# Altium PCB waterpump.PcbDoc
Units mm, origin at the board's own origin, x right, y up, seen from the top; angles counter-clockwise.
Board outline 92 x 86 mm, 2 copper layers (Top Layer, Bottom Layer), stack 1.58 mm thick; 34 components, 42 nets, 144 pads, 22 vias.
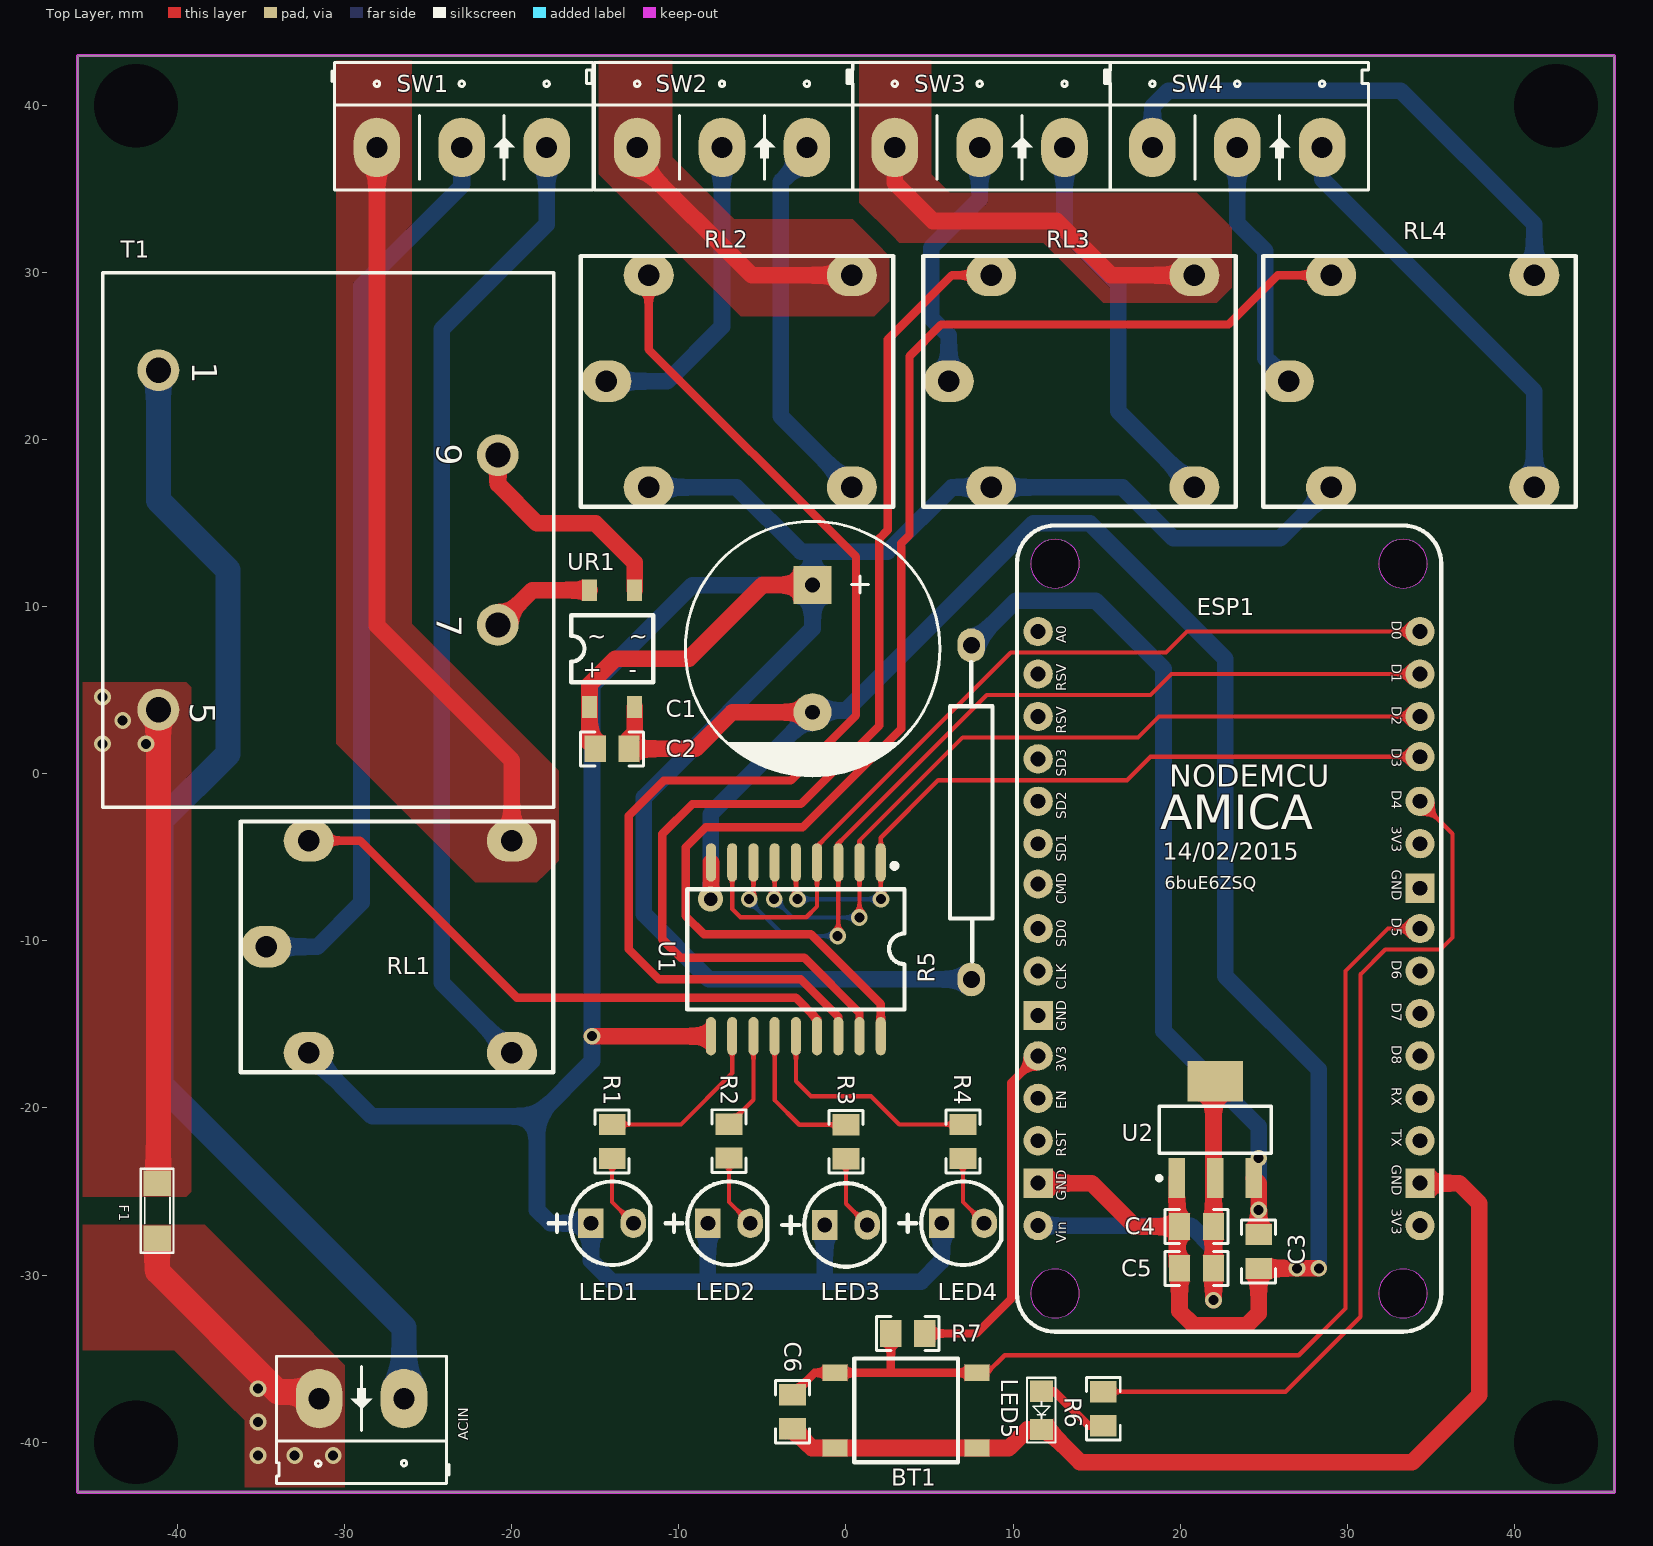
[diagram p0: Top Layer view]
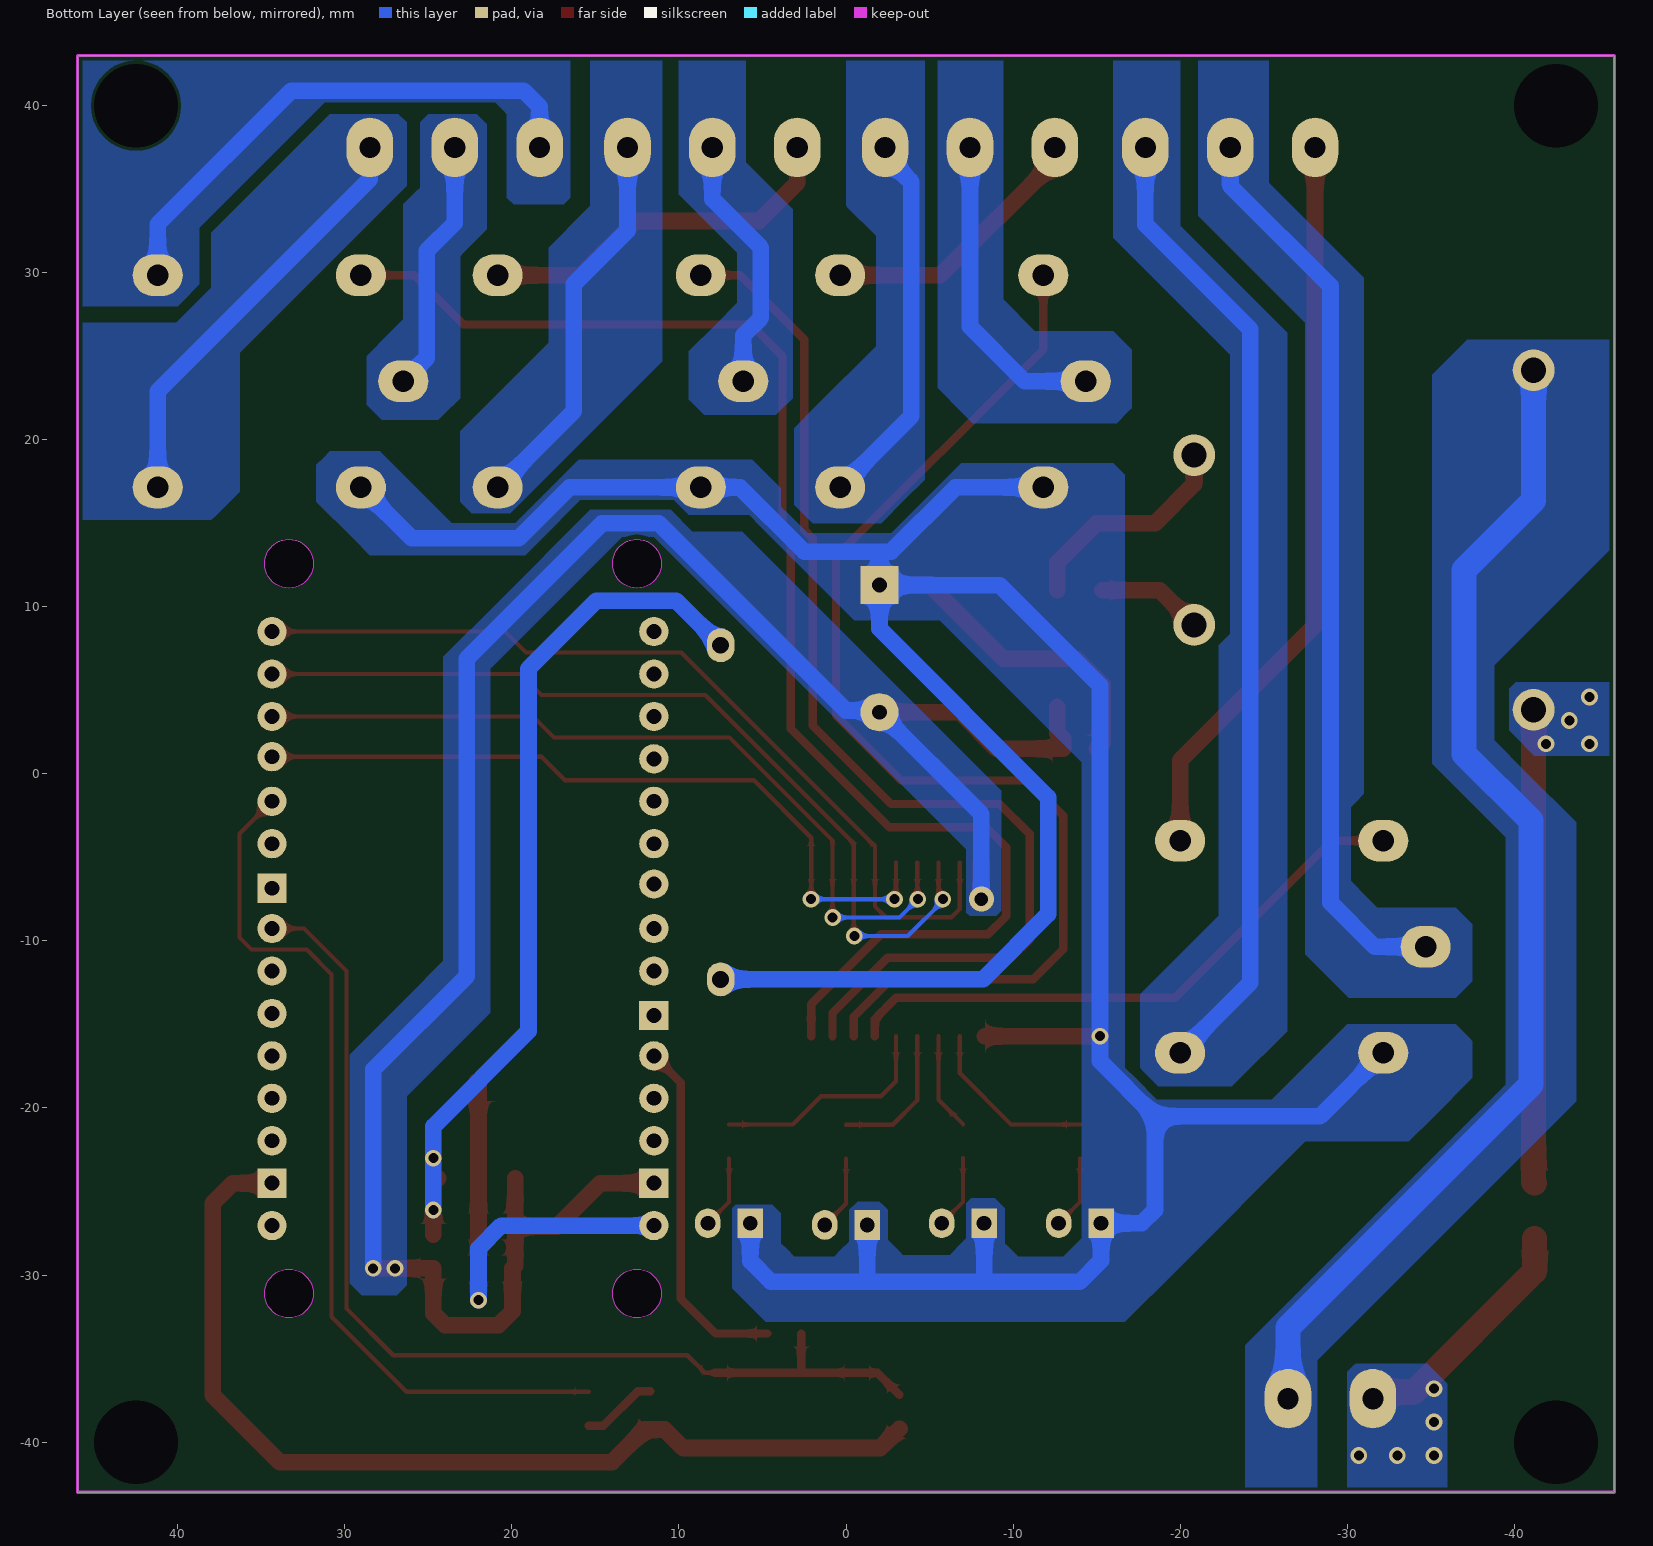
[diagram p1: Bottom Layer view, seen from below]

## Layer stack, top to bottom
Top Solder: solder mask 0.0102, Solder Resist, Dk 3.5
Top Layer: signal copper 0.0356
Dielectric 1: dielectric 1.5086, FR-4, Dk 4.8
Bottom Layer: signal copper 0.0356
Bottom Solder: solder mask 0.0102, Solder Resist, Dk 3.5

## Board outline
-46,-43 46,-43 46,43 -46,43

## Design rules (kind name [scope] priority, off if disabled: settings)
Clearance Clearance_1 [InNet('GND')] p1: gap=0.254
Clearance cutout [IsRegion] p2: gap=0.2
Clearance keepout [OnLayer('Keep-Out Layer')] p3: gap=0.2
Clearance [All] p4: gap=0.254
HoleSize [All] p1: absolutevalues=TRUE maxlimit=5 minlimit=0.01 maxpercent=80.000 minpercent=20.000
MinimumSolderMaskSliver [All] p1: minsoldermaskwidth=0.01
PolygonConnect [All] p1: connectstyle=Direct reliefconductorwidth=0.254 reliefentries=4 polygonreliefangle="90 Angle" airgapwidth=0.254
RoutingVias [All] p1: holewidth=0.3 width=0.6 viastyle="Through Hole" minholewidth=0.3 minwidth=0.6 maxholewidth=5 maxwidth=5
SilkToSilkClearance [All] p1: silktosilkclearance=0.1
SilkToSolderMaskClearance [IsPad] p1: minsilkscreentomaskgap=0.01 clearancetoexposedcopper=TRUE
SolderMaskExpansion [All] p1: expansion=0.102
Width [All] p1: maxlimit=5 minlimit=0.254 preferedwidth=0.254
26 further rules are at their usual default settings.

## Components (designator, comment, footprint, x,y, rotation, side; value= is the part's Value field where it differs from the comment)
ACIN "CON 2 KF301_MH" "CON 2 KF301" -29,-37.4 r180 top (schematic designator CON1)
BT1 "configure" "BUTTON 4P SMD" 3.6,-38.1 r0 top
C1 "2200uF" CP3/7 -2,7.5 r270 top locked
C2 "105" 0805_HV -14,1.5 r180 top
C3 "105" 0805_HV 24.7,-28.584 r90 top
C4 "105" 0805_HV 20.984,-27.1 r0 top
C5 "105" 0805_HV 20.984,-29.6 r0 top
C6 "105" 0805_HV -3.2,-38.184 r90 top
ESP1 "NodeMCU V1.0 ESP-12E" ESP-8266 10.205,14.768 r0 top locked
F1 "FUSE_AUTO_0.5A 8V 1206_MH" "FUSE 1206" -41.2,-26.2 r90 top
LED1 "LED3" "LED 3mm Do" -14,-26.9 r0 top
LED2 "LED3" "LED 3mm Do" -7,-26.9 r0 top
LED3 "LED3" "LED 3mm Do" 0,-27 r0 top
LED4 "LED3" "LED 3mm Do" 7,-26.9 r0 top
LED5 "status" LED_0805 11.7,-38.1 r270 top
R1 "1K" 0805_HV -14,-22 r270 top
R2 "1K" 0805_HV -7,-21.984 r270 top
R3 "1K" 0805_HV 0,-22.016 r270 top
R4 "1K" 0805_HV 7,-22 r270 top
R5 "10R" TRO_VACH_2W 7.5,-2.3 r90 top
R6 "1K" 0805_HV 15.4,-38 r90 top
R7 "1K" 0805_HV 3.7,-33.5 r0 top
RL1 "Relay 10A 5pin_MH" "relay 10A 5pin" -27.35,-10.35 r270 top locked
RL2 "Relay 10A 5pin_MH" "relay 10A 5pin" -7,23.5 r270 top locked
RL3 "Relay 10A 5pin_MH" "relay 10A 5pin" 13.5,23.5 r270 top locked
RL4 "Relay 10A 5pin_MH" "relay 10A 5pin" 33.85,23.5 r270 top locked
SW1 "CON 3 KF301_MH" "CON 3 KF301" -23,37.5 r0 top
SW2 "CON 3 KF301_MH" "CON 3 KF301" -7.42,37.5 r0 top (schematic designator SW1)
SW3 "CON 3 KF301_MH" "CON 3 KF301" 8,37.5 r0 top (schematic designator SW1)
SW4 "CON 3 KF301_MH" "CON 3 KF301" 23.42,37.5 r0 top (schematic designator SW1)
T1 "Trans Eq" AS3010 -31,14 r270 top locked
U1 "ULN2803A" SOIC-18_300MIL -3,-10.5 r270 top locked
U2 "AMS1117-5V SOT223 _MH" SOT223 22.1,-21.3 r0 top
UR1 "MB6S" MB6S -14,7.5 r0 top

## Footprints (in the part's own frame and the unit in brackets; to place one, negate y for a bottom-side part, rotate by r counter-clockwise, add the part's x,y. Pads: shape width x height; smd on the part's side, far side on the other; paste and mask are expansions set on the pad)
0805_HV [mil] "0805 with 30mil clearance between pads"
  rect 50x63 smd: 1(-40,0) 2(40,0)
  silkscreen extent -74,-40 74,40, body extent -43,-29 43,29, height 57
AS3010 [mm] "S3010-E-0150-120-S"
  round 2.5 hole 1.5: 1(-10.16,-10.16) 2(10.16,-10.16) 3(5.08,10.16) 4(-5.08,10.16)
  silkscreen extent -16,-13.5 16,13.5
"BUTTON 4P SMD" [mm]
  rect 1.5x1 smd: 1(-4.25,2.25) 1(4.25,2.25) 2(-4.25,-2.25) 2(4.25,-2.25)
  silkscreen extent -3.1,-3.1 3.1,3.1
"CON 2 KF301" [mil]
  oval 110x140 hole 50: 1(-100,0) 2(100,0)
  silkscreen extent -206,-100 200,200, body extent -197,-98 197,198, height 394
"CON 3 KF301" [mil]
  oval 110x140 hole 50: 1(-200,0) 2(0,0) 3(200,0)
  silkscreen extent -306,-100 309,200
CP3/7 [mil] "Tu hoa 4700uF/25V"
  rect 90x90 hole 35: 1(-150,0)
  round 90 hole 35: 2(150,0)
  silkscreen extent -300,-300 300,300
ESP-8266 [mil]
  round 115 hole 115 unplated paste-300 mask-300: 0(91,-1806) 0(91,-86) 0(911,-1806) 0(911,-86)
  round 69 hole 35: 3V3(51,-1246) 3V3(951,-746) A0(51,-246) CLK(51,-1046) CMD(51,-841) D0(951,-246) D1(951,-346) D2(951,-446) D3(951,-541) D4(951,-646) D5(951,-946) D6(951,-1046) D7(951,-1146) D8(951,-1246) EN(51,-1346) NC(951,-1646) RST(51,-1446) RSV(51,-446) RSV(51,-346) RX(951,-1346) SD0(51,-946) SD1(51,-746) SD2(51,-646) SD3(51,-546) TX(951,-1446) VIN(51,-1646)
  rect 69x69 hole 35: GND(51,-1546) GND_ESP(51,-1151) GND_ESP(951,-1546) GND_ESP(951,-851)
  Keep-Out Layer circle w2: c91,-86 r57.5
  Keep-Out Layer circle w2: c911,-86 r57.5
  Keep-Out Layer circle w2: c91,-1806 r57.5
  Keep-Out Layer circle w2: c911,-1806 r57.5
  silkscreen extent 1,-1896 1001,4
"FUSE 1206" [mil]
  rect 60x65 smd: 1(-63,0.94) 2(67,0.94)
  silkscreen extent -97,-37 101,40, body extent -63,-33 63,33, height 22
"LED 3mm Do" [mil] "Footprintf LED phi 3"
  rect 60x70 hole 35: 1(-50,0)
  oval 60x70 hole 35: 2(50,0)
  silkscreen extent -150,-98 90,98, body extent -77,-78 60,78, height 205
LED_0805 [mil]
  rect 50x55 smd: 1(-45,0) 2(45,0)
  silkscreen extent -77,-34 76,33, body extent -41,-16 41,20, height 33
MB6S [mm]
  rect 0.9x1.3 smd: 1(-1.35,-3.5) 2(1.35,-3.5) 3(1.35,3.5) 4(-1.35,3.5)
  silkscreen extent -2.44,-2.01 2.46,1.99
"relay 10A 5pin" [mm]
  oval 2.5x3 hole 1.3: 1(0,-7.35) 2(-6.35,7.35) 3(6.35,7.35) 4(-6.35,-4.81) 5(6.35,-4.81)
  silkscreen extent -7.49,-8.87 7.51,9.83, body extent -7.49,-8.87 7.49,9.79, height 16
SOIC-18_300MIL [mm]
  oval 2.3x0.6 smd: 1(-5.2,5.08) 2(-5.2,3.81) 3(-5.2,2.54) 4(-5.2,1.27) 5(-5.2,0) 6(-5.2,-1.27) 7(-5.2,-2.54) 8(-5.2,-3.81) 9(-5.2,-5.08) 10(5.2,-5.08) 11(5.2,-3.81) 12(5.2,-2.54) 13(5.2,-1.27) 14(5.2,0) 15(5.2,1.27) 16(5.2,2.54) 17(5.2,3.81) 18(5.2,5.08)
  silkscreen extent -5.15,-6.5 3.6,6.5, body extent -5.15,-5.76 5.15,5.77, height 2.65
SOT223 [mm]
  rect 1x2.4 smd: 1(-2.3,-2.9) 2(0,-2.9) 3(2.3,-2.9)
  rect 3.3x2.4 smd: 4(0,2.9)
  silkscreen extent -3.47,-3.02 3.35,1.4, body extent -3.25,-3.56 3.25,3.4, height 1.68
TRO_VACH_2W [mil]
  oval 80x65 hole 40: 1(-393.7,0) 2(393.7,0)
  silkscreen extent -351,-50 354,50, body extent -414,-110 414,107, height 217

## Part data
ACIN: "CON 2 KF301, 5.08mm"
BT1: library part "BUTTON 4P SMD_MH", "Nút nh?n 4 chân, dán"
C1: library part TU_HOA_2200uF_25V_MH, "2200uF_25V"
C2 C3 C4 C5 C6: library part CM, "Cap SMD"
ESP1: "NodeMCU V1.0 ESP8266 (ESP-12E)"
F1: "Fuse"
LED1 LED2 LED3 LED4: library part "LED 3mm_MH", "LED 3mm"
LED5: library part "LED SMD_0805_MH", "LED 3mm"
R1 R2 R3 R4 R6 R7: library part R, "Resistor 1/4W"
R5: library part TRO_CS_2W_MH
RL1 RL2 RL3 RL4: "Relay"
SW1 SW2 SW3 SW4: "CON 3 KF301, 5.08mm"
T1: "Transformer (Equivalent Circuit Model)"
U2: library part "AMS1117-3.3V SOT223 _MH", "AMS1117-3.3V SOT223 _MH"

## Free pads (board coordinates)
  round 3 hole 5 paste+0: NC(-42.5,-40) NC(-42.5,40) NC(42.5,-40) NC(42.5,40)

## Via types
v1: diameter 1, hole 0.6, Top Layer to Bottom Layer, tented both sides, 21 vias
v2: diameter 1.5, hole 0.8, Top Layer to Bottom Layer, tented both sides, 1 vias

## Nets (pads, with @x,y where several pads share a name; then routed paths per layer and width w, separated by ;. In a path a pad name is that pad's centre, name@x,y a point inside that pad or via, vN(x,y) a via of type N, cw(c..) or ccw(c..) an arc to the next point about the centre after c; other vN are vias at no path point)
3.3V: ESP1.3V3@11.5,-16.88 R7.2 | length 21.2
  Top Layer w0.5: R7.2 7.8,-33.5 9.9,-31.4 9.9,-18.48 ESP1.3V3@11.5,-16.88
5V: C4.2 C5.2 ESP1.VIN U2.2 U2.4 | length 27.3
  Top Layer w1: v1(22,-31.5) C5.2 C4.2 22,-18.5 U2.4
  Bottom Layer w1: ESP1.VIN 20.64,-27.04 22,-28.4 v1(22,-31.5)
ACIN_L: ACIN.1 T1.1 | length 70.6
  Bottom Layer w1.5: T1.1 -41.16,16.36 -37,12.2 -37,1.2 -41,-2.8 -41,-18.6 -26.46,-33.14 ACIN.1@-26.46,-37
ACIN_N: F1.2 T1.2 | length 28.4
  Top Layer w1.5: F1.2 -41.16,-24.434 T1.2
  other v1: -44.5,1.8 -41.9,1.8 -43.3,3.2 -44.5,4.6
ACO1: T1.3 UR1.4 | length 6.4
  Top Layer w1: T1.3 -18.76,11 UR1.4
ACO2: T1.4 UR1.3 | length 13.5
  Top Layer w1: T1.4 -20.84,17.34 -18.5,15 -15,15 -12.65,12.65 UR1.3
BT1: BT1.1 C6.2 ESP1.D5 R7.1 | length 63.3
  Top Layer w0.254: BT1.1@7.85,-35.85 8.45,-35.85 9.5,-34.8 27.1,-34.8 29.9,-32 29.9,-11.8 32.44,-9.26 ESP1.D5
  Top Layer w0.5: C6.2 -1.882,-35.85 -0.65,-35.85 2.6,-35.85 ; R7.1 2.684,-35.766 2.6,-35.85 ; BT1.1@7.85,-35.85 2.6,-35.85
GND: C1.2 C2.1 C3.1 C4.1 C5.1 ESP1.GND U1.9 U2.1 UR1.2 | length 131.3
  Top Layer w1: UR1.2 -12.65,2.45 -12.984,2.116 C2.1 -9,1.5 -6.81,3.69 C1.2 ; v2(-8.1,-7.5) -8.08,-7.48 U1.9 ; ESP1.GND 14.7,-24.5 17.3,-27.1 C4.1@19.8,-27.1 ; U2.1 C4.1@19.8,-27.1 ; C4.1 C4.1@19.8,-27.1 ; v1(28.3,-29.6) v1(27,-29.6) C3.1 24.7,-32.3 24,-33 20.8,-33 19.968,-32.168 C5.1 19.8,-29.432 C4.1@19.8,-27.1
  Bottom Layer w1: v2(-8.1,-7.5) -8.1,-2.41 C1.2 -2,3.8 0,3.8 11.2,15 14.6,15 22.7,6.9 22.7,-12.1 28.3,-17.7 v1(28.3,-29.6)
GND_ESP: BT1.2 C6.1 ESP1.GND_ESP@34.36,-24.5 LED5.2 | length 60
  Top Layer w1: C6.1 -2.05,-40.35 -0.65,-40.35 7.85,-40.35 9.75,-40.35 10.857,-39.243 LED5.2 12.043,-39.243 14,-41.2 33.9,-41.2 37.9,-37.2 37.9,-25.7 36.7,-24.5 ESP1.GND_ESP@34.36,-24.5
LED1: R1.1 U1.11 | length 10.7
  Top Layer w0.254: R1.1 -9.884,-20.984 -6.81,-17.91 U1.11
LED2: R2.1 U1.12 | length 5.9
  Top Layer w0.254: R2.1 -5.54,-19.508 U1.12
LED3: R3.1 U1.13 | length 8.7
  Top Layer w0.254: U1.13 -4.27,-19.53 -2.8,-21 R3.1
LED4: R4.1 U1.14 | length 13.8
  Top Layer w0.254: U1.14 -3,-18.4 -2.1,-19.3 1.5,-19.3 3.184,-20.984 R4.1
LED5: ESP1.D4 R6.2 | length 53.1
  Top Layer w0.254: R6.2 26.316,-36.984 30.8,-32.5 30.8,-12 32.283,-10.517 35.583,-10.517 36.3,-9.8 36.3,-3.58 ESP1.D4
NetACIN_2: ACIN.2 F1.1 | length 14.7
  Top Layer w1.5: F1.1 -41.224,-29.776 -34,-37 ACIN.2@-31.54,-37
  other v1: -35.2,-40.8 -33,-40.8 -30.7,-40.8 -35.2,-38.8 -35.2,-36.8
NetC3_2: C3.2 R5.2 U2.3 | length 52.5
  Top Layer w1: U2.3 24.7,-24.5 C3.2
  Bottom Layer w1: R5.2 10.169,10.369 14.931,10.369 19,6.3 19,-15.4 24.7,-21.1 v1(24.7,-23) v1(24.7,-26.1)
NetLED1_2: LED1.2 R1.2 | length 4.4
  Top Layer w0.254: R1.2 -14,-25.63 LED1.2
NetLED2_2: LED2.2 R2.2 | length 4.4
  Top Layer w0.254: R2.2 -7,-25.63 LED2.2
NetLED3_2: LED3.2 R3.2 | length 4.5
  Top Layer w0.254: R3.2 0,-25.73 LED3.2
NetLED4_2: LED4.2 R4.2 | length 4.4
  Top Layer w0.254: R4.2 7,-25.63 LED4.2
NetLED5_1: LED5.1 R6.1 | length 4.6
  Top Layer w0.5: LED5.1 12.457,-36.957 14.516,-39.016 R6.1
NetRL1_1: RL1.1 SW1.2 | length 54
  Bottom Layer w1: RL1.1 -31.65,-10.35 -29,-7.7 -29,29.2 -23,35.2 SW1.2@-23,37
NetRL1_2: RL1.2 SW1.1 | length 44.3
  Top Layer w1: SW1.1@-28.08,37 -28.08,8.88 -20,0.8 RL1.2
NetRL1_3: RL1.3 SW1.3 | length 58
  Bottom Layer w1: RL1.3 -24.2,-12.5 -24.2,26.6 -17.92,32.88 SW1.3@-17.92,37
NetRL2_1: RL2.1 SW2.2 | length 18.5
  Bottom Layer w1: RL2.1 -10.7,23.5 -7.42,26.78 SW2.2@-7.42,37
NetRL2_2: RL2.2 SW2.1 | length 16
  Top Layer w1: SW2.1@-12.5,37 -12.5,36.7 -5.65,29.85 RL2.2
NetRL2_3: RL2.3 SW2.3 | length 22.3
  Bottom Layer w1: SW2.3@-2.34,37 -3.9,35.44 -3.9,21.4 RL2.3
NetRL3_1: RL3.1 SW3.2 | length 15.1
  Bottom Layer w1: RL3.1 6.15,26.25 5.1,27.3 5.1,31.5 8,34.4 SW3.2@8,37
NetRL3_2: RL3.2 SW3.1 | length 21.8
  Top Layer w1: SW3.1@2.92,37 2.92,35.38 5.2,33.1 12.6,33.1 15.85,29.85 RL3.2
NetRL3_3: RL3.3 SW3.3 | length 23.1
  Bottom Layer w1: SW3.3@13.08,37 13.08,32.52 16.3,29.3 16.3,21.7 RL3.3
NetRL4_1: RL4.1 SW4.2 | length 14.8
  Bottom Layer w1: SW4.2@23.42,37 23.42,32.98 25.1,31.3 25.1,24.9 RL4.1
NetRL4_2: RL4.2 SW4.1 | length 32.6
  Bottom Layer w1: SW4.1@18.34,37 SW4.1 18.34,39.94 19.3,40.9 33.2,40.9 41.2,32.9 RL4.2
NetRL4_3: RL4.3 SW4.3 | length 25.1
  Bottom Layer w1: SW4.3@28.5,37 28.5,35.6 41.2,22.9 RL4.3
RL1: RL1.4 U1.15 | length 35.9
  Top Layer w0.5: RL1.4 -29.1,-4 -19.7,-13.4 -3,-13.4 -1.73,-14.67 U1.15
RL2: RL2.4 U1.16 | length 70.9
  Top Layer w0.5: RL2.4 -11.81,25.41 0.6,13 0.6,3.5 -3.3,-0.4 -10.9,-0.4 -13,-2.5 -13,-10.5 -11.2,-12.3 -2.7,-12.3 -0.46,-14.54 U1.16
RL3: RL3.4 U1.17 | length 68.1
  Top Layer w0.5: U1.17 0.81,-14.31 -2.5,-11 -9.9,-11 -11,-9.9 -11,-3.6 -9.2,-1.8 -2.7,-1.8 2,2.9 2,14.1 2.5,14.6 2.5,26 6.35,29.85 RL3.4
RL4: RL4.4 U1.18 | length 85.5
  Top Layer w0.5: U1.18 2.08,-13.78 -2.1,-9.6 -8.5,-9.6 -9.6,-8.5 -9.6,-4.4 -8.4,-3.2 -2.6,-3.2 3.3,2.7 3.3,13.8 3.8,14.3 3.8,25 5.7,26.9 22.9,26.9 25.85,29.85 RL4.4
RLC1: ESP1.D0 U1.4 U1.8 | length 53.4
  Top Layer w0.254: U1.8 -6.81,-8.09 -6.319,-8.581 -2.381,-8.581 -1.73,-7.93 U1.4 -1.73,-4.33 9.863,7.263 19.163,7.263 20.42,8.52 ESP1.D0
RLC2: ESP1.D1 U1.3 U1.7 | length 53.4
  Top Layer w0.254: v1(-5.8,-7.5) -5.58,-7.5 -5.54,-7.54 U1.7 ; v1(-0.5,-9.7) -0.46,-9.66 U1.3 -0.46,-4.16 8.423,4.723 18.223,4.723 19.48,5.98 ESP1.D1
  Bottom Layer w0.254: v1(-5.8,-7.5) -5.8,-7.6 -3.7,-9.7 v1(-0.5,-9.7)
RLC3: ESP1.D2 U1.2 U1.6 | length 49
  Top Layer w0.254: v1(-4.3,-7.5) -4.27,-7.47 U1.6 ; v1(0.8,-8.6) 0.81,-8.59 U1.2 0.81,-3.99 6.983,2.183 17.483,2.183 18.74,3.44 ESP1.D2
  Bottom Layer w0.254: v1(-4.3,-7.5) -3.2,-8.6 v1(0.8,-8.6)
RLC4: ESP1.D3 U1.1 U1.5 | length 45.2
  Top Layer w0.254: U1.5 -3,-7.4 v1(-2.9,-7.5) ; v1(2.1,-7.5) 2.08,-7.48 U1.1 2.08,-3.82 5.517,-0.383 16.817,-0.383 18.227,1.027 ESP1.D3
  Bottom Layer w0.254: v1(-2.9,-7.5) v1(2.1,-7.5)
VCC: C1.1 C2.2 LED1.1 LED2.1 LED3.1 LED4.1 R5.1 RL1.5 RL2.5 RL3.5 RL4.5 U1.10 UR1.1 | length 221.1
  Top Layer w1: v1(-15.2,-15.7) U1.10@-8.3,-15.7 ; C2.2 -15.35,1.834 UR1.1 -15.35,5.35 -13.8,6.9 -9.4,6.9 -4.99,11.31 C1.1
  Bottom Layer w1: RL1.5 -28.36,-20.5 -18.5,-20.5 ; RL2.5 -6.55,17.15 -2.7,13.3 -2,13.3 ; LED2.1 -8.27,-30.37 -8.3,-30.4 ; LED3.1 -1.27,-30.23 -1.1,-30.4 ; LED4.1 5.73,-29.17 4.5,-30.4 -1.1,-30.4 ; R5.1 -8.2,-12.3 -12.1,-8.4 -12.1,-1.4 -2,8.7 C1.1 ; RL4.5 25.99,14.1 19.6,14.1 16.55,17.15 RL3.5 6.35,17.15 2.5,13.3 -2,13.3 ; -18.5,-20.5 -15.2,-17.2 -15.2,5.3 -9.2,11.3 -5.2,11.3 -5.19,11.31 C1.1 ; -18.5,-20.5 -18.5,-26.1 -17.7,-26.9 LED1.1 -15.27,-29.13 -14,-30.4 -8.3,-30.4 ; -8.3,-30.4 -1.1,-30.4 ; C1.1 -2,13.3
pads on no net: ESP1.0 ESP1.3V3@34.36,-4.18 ESP1.A0 ESP1.CLK ESP1.CMD ESP1.D6 ESP1.D7 ESP1.D8 ESP1.EN ESP1.GND_ESP@11.5,-14.467 ESP1.GND_ESP@34.36,-6.847 ESP1.NC ESP1.RST ESP1.RSV ESP1.RX ESP1.SD0 ESP1.SD1 ESP1.SD2 ESP1.SD3 ESP1.TX

## Polygon pours and split planes (outlines as drawn)
NetRL4_2 on Bottom Layer "Bottom Layer-No Net" (solid, pour order 2): 16.5,34.5 16.5,43 46,43 46,28 40,28 39.8,28.2 38.7,29.3 38.7,32.1 38.7,32.7 34.3,37.1 31.2,40.2 27.1,40.2 21,40.2 20.5,39.7 20.3,39.5 20.3,35.8 20.3,34.5 19.9,34.1 17.6,34.1 16.9,34.1 16.5,34.5
NetRL4_1 on Bottom Layer "Bottom Layer-No Net" (solid, pour order 4): 25,39.5 22.1,39.5 21.5,38.9 21.5,35.5 21.5,32.6 22.9,31.2 23.1,31 23.1,26.6 23.1,22.5 24.1,21.5 24.4,21.2 26.7,21.2 27.8,21.2 28.1,21.5 28.7,22.1 28.7,23.6 28.7,25 27.3,26.4 26.5,27.2 26.5,31.5 26.5,34.1 25.7,34.9 25.5,35.1 25.5,38.9 25.5,39 25,39.5
NetRL4_3 on Bottom Layer "Bottom Layer-No Net" (solid, pour order 6): 26.3,39 26.3,35.2 27.1,34.4 36.3,25.2 36.3,17.2 36.3,16.9 37.8,15.4 38,15.2 46,15.2 46,27 41.5,27 40.1,27 38.2,28.9 38,29.1 38,31.8 38,32.4 36.2,34.2 30.9,39.5 27.6,39.5 26.8,39.5 26.3,39
NetRL3_1 on Bottom Layer "Bottom Layer-No Net" (solid, pour order 8): 6,42.9 6,36.6 3.2,33.8 3.2,26.6 3.2,22.5 4,21.7 4.2,21.5 7.2,21.5 8.5,21.5 9.3,22.3 9.4,22.4 9.4,24.4 9.4,25.3 7.8,26.9 6.5,28.2 6.5,30.1 6.5,31.2 8.3,33 10,34.7 10,39.6 10,43
NetRL3_3 on Bottom Layer "Bottom Layer-No Net" (solid, pour order 10): 11,43 11,36.2 11,24.7 18.7,17 20.1,15.6 21.2,15.6 22.4,15.6 22.7,15.9 23.1,16.3 23.1,19.4 23.1,20.5 20.8,22.8 17.8,25.8 17.8,29.9 17.8,31.5 15.6,33.7 15.3,34 15.3,40.2 15.3,43
NetRL2_3 on Bottom Layer "Bottom Layer-No Net" (solid, pour order 14): -4.7,42.906 -4.7,17.6 -3.5,16.4 -2.1,15 0.6,15 2,15 2.6,15.6 3.1,16.1 3.1,18.9 3.1,20.7 1.8,22 -1.8,25.6 -1.8,30.7 -1.8,32.2 -0.1,33.9 0,34 0,36.8 0,43
NetRL2_1 on Bottom Layer "Bottom Layer-No Net" (solid, pour order 16): -5.5,43 -5.5,37 -5.5,23.1 -7,21.6 -7.6,21 -15.1,21 -16.2,21 -16.9,21.7 -17.1,21.9 -17.1,24.8 -17.1,25.4 -16.4,26.1 -16,26.5 -13,26.5 -11.3,26.5 -9.4,28.4 -9.4,38.3 -9.4,42.9 -9.4,43
NetRL1_3 on Bottom Layer "Bottom Layer-No Net" (solid, pour order 21): -20,43 -20,32.9 -20,32.8 -26.4,26.4 -26.4,-15.4 -23.4,-18.4 -23.1,-18.7 -20.8,-18.7 -18.7,-18.7 -17.8,-17.8 -17.6,-17.6 -17.6,-14.9 -17.6,-13.2 -21.4,-9.4 -22.3,-8.5 -22.3,-2.2 -22.3,7.7 -22.9,8.3 -23,8.4 -23,10.8 -23,25.1 -19.9,28.2 -16,32.1 -16,38.4 -16,43
NetRL1_1 on Bottom Layer "Bottom Layer-No Net" (solid, pour order 23): -25.3,43 -25.3,35.5 -25.3,35.4 -29.7,31 -31,29.7 -31,25.1 -31,-1.2 -30.5,-1.7 -30.2,-2 -30.2,-3.2 -30.2,-6.4 -31.2,-7.4 -31.8,-8 -34.4,-8 -36.5,-8 -36.9,-8.4 -37.5,-9 -37.5,-9.7 -37.5,-12.4 -36.6,-13.3 -36.5,-13.4 -35,-13.4 -30.1,-13.4 -29.2,-12.5 -27.5,-10.8 -27.5,-8.6 -27.5,27 -23.1,31.4 -21.1,33.4 -21.1,39.3 -21.1,43.1
GND on Bottom Layer "Bottom Layer-No Net" (solid, pour order 27): -9.3,-8.2 -9.3,-1 -3.1,5.2 6.2,14.5 9.1,14.5 9.2,14.5 10.5,15.8 13.9,15.8 15.3,15.8 20.8,10.3 24.1,7 24.1,-5.7 24.1,-11.2 26.3,-13.4 29.7,-16.8 29.7,-29.1 29.7,-30.5 29,-31.2 27.2,-31.2 26.9,-31.2 26.6,-30.9 26.3,-30.6 26.3,-28.1 26.3,-19.3 23.3,-16.3 21.3,-14.3 21.3,-5.5 21.3,6.3 18.6,9 13.4,14.2 11.6,14.2 11.5,14.2 10.7,13.4 -7.2,-4.5 -7.2,-8.2 -7.2,-8.3 -7.4,-8.5 -9,-8.5
VCC on Bottom Layer "Bottom Layer-No Net" (solid, pour order 29): -30,-15 -35.9,-15 -36.5,-15 -37.3,-15.8 -37.5,-16 -37.5,-17.8 -37.5,-18.2 -35.1,-20.6 -33.7,-22 -28.2,-22 -27.5,-22 -19.8,-29.7 -16.7,-32.8 -1.9,-32.8 4.8,-32.8 6.6,-31 6.8,-30.8 6.8,-28.2 6.8,-26 6.6,-25.8 4.9,-25.8 4.4,-25.8 3.9,-26.3 3.9,-27.8 3.9,-28.1 3.5,-28.5 3.1,-28.9 1.8,-28.9 0.7,-28.9 0.3,-28.5 -0.2,-28 -0.2,-26.8 -0.2,-26.1 -0.6,-25.7 -0.7,-25.6 -1.6,-25.6 -2,-25.6 -2.2,-25.8 -2.5,-26.1 -2.5,-26.6 -2.5,-27.9 -3.3,-28.7 -3.4,-28.8 -4.1,-28.8 -6.2,-28.8 -7,-28 -7.2,-27.8 -7.2,-25.9 -7.2,-25.7 -7.5,-25.4 -8.4,-25.4 -8.9,-25.4 -9.2,-25.7 -9.5,-26 -9.5,-27.5 -9.5,-28.1 -9.8,-28.4 -10.3,-28.9 -11.9,-28.9 -13,-28.9 -13.5,-28.4 -14.1,-27.8 -14.1,-26.5 -14.1,0.7 -10.3,4.5 -5.6,9.2 -1.9,9.2 -0.5,9.2 5.1,14.8 5.8,15.5 7.5,15.5 9.4,15.5 10.2,16.3 10.3,16.4 13.7,16.4 15.9,16.4 18.3,14 19.2,13.1 27.9,13.1 28.5,13.1 29.5,14.1 31.7,16.3 31.7,18.3 31.7,18.5 31.3,18.9 30.9,19.3 29.1,19.3 27.9,19.3 27.4,18.8 23.6,15 20.6,15 19.8,15 16.6,18.2 16,18.8 5.8,18.8 5.6,18.8 4.6,17.8 3.9,17.1 3.9,16.3 3.9,16 3.4,15.5 2.3,14.4 -2.7,14.4 -5.2,16.9 -6.9,18.6 -13.2,18.6 -16,18.6 -16.7,17.9 -16.7,16.9 -16.7,-17.6 -17.3,-18.2 -18.6,-19.5 -22.8,-19.5 -25.5,-19.5 -30,-15
ACIN_L on Bottom Layer "Bottom Layer-No Net" (solid, pour order 31): -39.5,26 -46,26 -46,19.2 -46,13.8 -46,13.7 -43.5,11.2 -38.8,6.5 -38.8,2.5 -38.8,2 -40.7,0.1 -43.7,-2.9 -43.7,-10.5 -43.7,-19.6 -33.6,-29.7 -28.2,-35.1 -28.2,-43 -28.1,-42.9 -23.9,-42.9 -23.9,-34.2 -39.5,-18.6 -39.5,-3.8 -36.1,-0.4 -35.1,0.6 -35.1,10.3 -35.1,23.9 -37.2,26
ACIN_N on Bottom Layer "Bottom Layer-No Net" (solid, pour order 37): -40.1,5.5 -46,5.5 -46,1.1 -41.2,1.1 -40,2.3 -39.7,2.6 -39.7,3.9 -39.7,5.1 -40.1,5.5
NetACIN_2 on Bottom Layer "Bottom Layer-No Net" (solid, pour order 39): -30,-43 -30,-38 -30,-35.8 -30.4,-35.4 -30.5,-35.3 -34,-35.3 -34.8,-35.3 -35.4,-35.9 -36,-36.5 -36,-39.7 -36,-43.1
NetRL3_2 on Top Layer "Bottom Layer-No Net" (solid, pour order 12): 0.8,43 0.8,39.6 0.8,34.2 2.8,32.2 3.2,31.8 8.7,31.8 11.8,31.8 13.9,29.7 15.4,28.2 21.7,28.2 22.2,28.2 23,29 23.1,29.1 23.1,31.9 23.1,32.7 22.5,33.3 21,34.8 6.2,34.8 5.5,35.5 5.1,35.9 5.1,39.8 5.1,43
NetRL2_2 on Top Layer "Bottom Layer-No Net" (solid, pour order 19): -14.8,43 -14.8,36.4 -14.8,35.9 -9.9,31 -6.3,27.4 0.5,27.4 1.7,27.4 2.4,28.1 2.6,28.3 2.6,30.7 2.6,31 1.8,31.8 0.4,33.2 -5,33.2 -6.7,33.2 -10.4,36.9 -10.4,40 -10.4,42.9 -10.5,43
NetRL1_2 on Top Layer "Bottom Layer-No Net" (solid, pour order 25): -30.5,43 -30.5,34.5 -30.5,1.8 -23.8,-4.9 -22.2,-6.5 -19.3,-6.5 -18.5,-6.5 -18,-6 -17.2,-5.2 -17.2,-1.8 -17.2,0.2 -21.7,4.7 -26,9 -26,42.2 -26,42.9 -26.1,43
ACIN_N on Top Layer "Bottom Layer-No Net" (solid, pour order 33): -39.5,5.5 -46,5.5 -46,-25.3 -39.5,-25.3 -39.2,-25 -39.2,-24.6 -39.2,5.2 -39.5,5.5
NetACIN_2 on Top Layer "Bottom Layer-No Net" (solid, pour order 35): -39.5,-27 -46,-27 -46,-34.5 -40.2,-34.5 -37.1,-37.6 -36,-38.7 -36,-43 -30,-43 -30,-35.8 -30,-35.4 -33.7,-31.7 -38.4,-27 -39.6,-27

## Keep-outs
Keep-Out Layer:
  the board outline again, w0.2

## Silkscreen, mask and mechanical layers (free items; w line width, h text height)
Top Solder:
  lines w2: -28.08,37.5 -28.08,4.08 -20,-4 ; -12.5,37.5 -12.5,36.4 -9.1,33 -6.9,30.8 -6.1,30 -0.2,30 0,29.8 ; 2.92,37.5 2.92,35.28 4.9,33.3 17.4,33.3 20.85,29.85
Bottom Solder:
  lines w2: -34.4,-10.6 -34.3,-10.5 -31.1,-10.5 -28.9,-8.3 -28.9,28.7 -23,34.6 -23,37.5 ; -20.1,-16.9 -24.6,-12.4 -24.6,26 -24.2,26.4 ; -17.92,37.5 -17.92,32.68 -20.7,29.9 -24.2,26.4 ; -13.9,23.5 -13.8,23.6 -9.8,23.6 -7.42,25.98 -7.42,37.5 ; -2.5,37.7 -2.5,34.9 -3.2,34.2 -3.2,20.4 0.3,16.9 ; 5,32.9 5,24.65 6.15,23.5 ; 5.2,33 8.1,35.9 8.1,37.9 ; 13.3,37.7 13.1,37.5 13.1,26.6 18.5,21.2 ; 18.34,37.5 18.34,40.04 19.8,41.5 33.7,41.5 38.6,36.6 40.9,34.3 40.9,30.4 41.1,30.2 ; 20.85,17.15 20.9,17.2 20.9,18.8 18.5,21.2 ; 23.4,37.9 23.4,34.6 24.5,33.5 24.5,25.5 26.5,23.5 ; 28.5,37.5 28.5,37.2 34.1,31.6 34.1,30.5 37.7,26.9 41,23.6 41,17.7 41.2,17.5 ; -24.2,26.4 -24.2,26.4 ; 18.5,21.2 18.5,21.2
Mechanical 3:
  lines w0.2: -14,-43 -14,-26.9 46,-26.9 ; 0,-43 0,43 ; 2.5,-9 2.5,0 ; 7,-43 7,-26.9 ; 46,0 -46,0 ; -46,0 -46,0 ; -35,-43 35,-43 35,-34 -35,-34 -35,-43 ; -35,34 -35,43 35,43 35,34 -35,34 ; -7,-43 -7,-26.9 -7,-43 ; 1,43 1,43
Mechanical 4:
  text "GND" at 81.01,-19.754 h1 r90
  text "3V" at 78.51,-20.254 h1 r90

## Text inside footprints (layer, text, board x,y; h text height)
ESP1: Top Overlay "GND" at 13.405,-15.407 h1 r90; Top Overlay "3V3" at 13.405,-17.871 h1 r90; Top Overlay "EN" at 13.405,-20.08 h1 r90; Top Overlay "RST" at 13.405,-22.925 h1 r90; Top Overlay "GND" at 13.405,-25.541 h1 r90; Top Overlay "Vin" at 13.405,-28.081 h1 r90; Top Overlay "D7" at 32.455,-13.711 h1 r270; Top Overlay "D8" at 32.455,-16.248 h1 r270; Top Overlay "RX" at 32.455,-18.761 h1 r270; Top Overlay "TX" at 32.455,-21.274 h1 r270; Top Overlay "GND" at 32.455,-23.388 h1 r270; Top Overlay "3V3" at 32.455,-26.024 h1 r270; Top Overlay "D6" at 32.455,-11.143 h1 r270; Top Overlay "CMD" at 13.405,-7.816 h1 r90; Top Overlay "D0" at 32.455,9.18 h1 r270; Top Overlay "D1" at 32.455,6.606 h1 r270; Top Overlay "D2" at 32.455,4.06 h1 r270; Top Overlay "D3" at 32.455,1.52 h1 r270; Top Overlay "D4" at 32.455,-0.98 h1 r270; Top Overlay "3V3" at 32.455,-3.139 h1 r270; Top Overlay "GND" at 32.455,-5.729 h1 r270; Top Overlay "D5" at 32.455,-8.625 h1 r270; Top Overlay "A0" at 13.405,7.834 h1 r90; Top Overlay "RSV" at 13.405,4.939 h1 r90; Top Overlay "RSV" at 13.405,2.388 h1 r90; Top Overlay "SD3" at 13.405,-0.163 h1 r90; Top Overlay "SD2" at 13.405,-2.714 h1 r90; Top Overlay "SD1" at 13.405,-5.265 h1 r90; Top Overlay "SD0" at 13.405,-10.367 h1 r90; Top Overlay "CLK" at 13.405,-12.918 h1 r90; Top Overlay "6buE6ZSQ" at 19.069,-6.898 h0.76; Top Overlay "NODEMCU" at 19.349,-1.208 h2.29; Top Overlay "AMICA" at 18.815,-4.002 h3.56; Top Overlay "14/02/2015" at 18.968,-5.501 h1.75
T1: Top Overlay "1" at -39.128,24.668 h1.5 r270; Top Overlay "5" at -39.25,4.25 h1.5 r270; Top Overlay "9" at -24.5,19.75 h1.5 r270; Top Overlay "7" at -24.5,9.5 h1.5 r270
UR1: Top Overlay "~" at -13,7.75 h1; Top Overlay "~" at -15.5,7.75 h1; Top Overlay "-" at -13,5.75 h1; Top Overlay "+" at -15.75,5.75 h1